# Altium PCB Pannelisation_01.PcbDoc
Units mil, origin at the board's own origin, x right, y up, seen from the top; angles counter-clockwise.
Board outline 5225 x 4925 mil, 2 copper layers (Top Layer, Bottom Layer); 213 components, 0 nets, 645 pads, 201 vias.
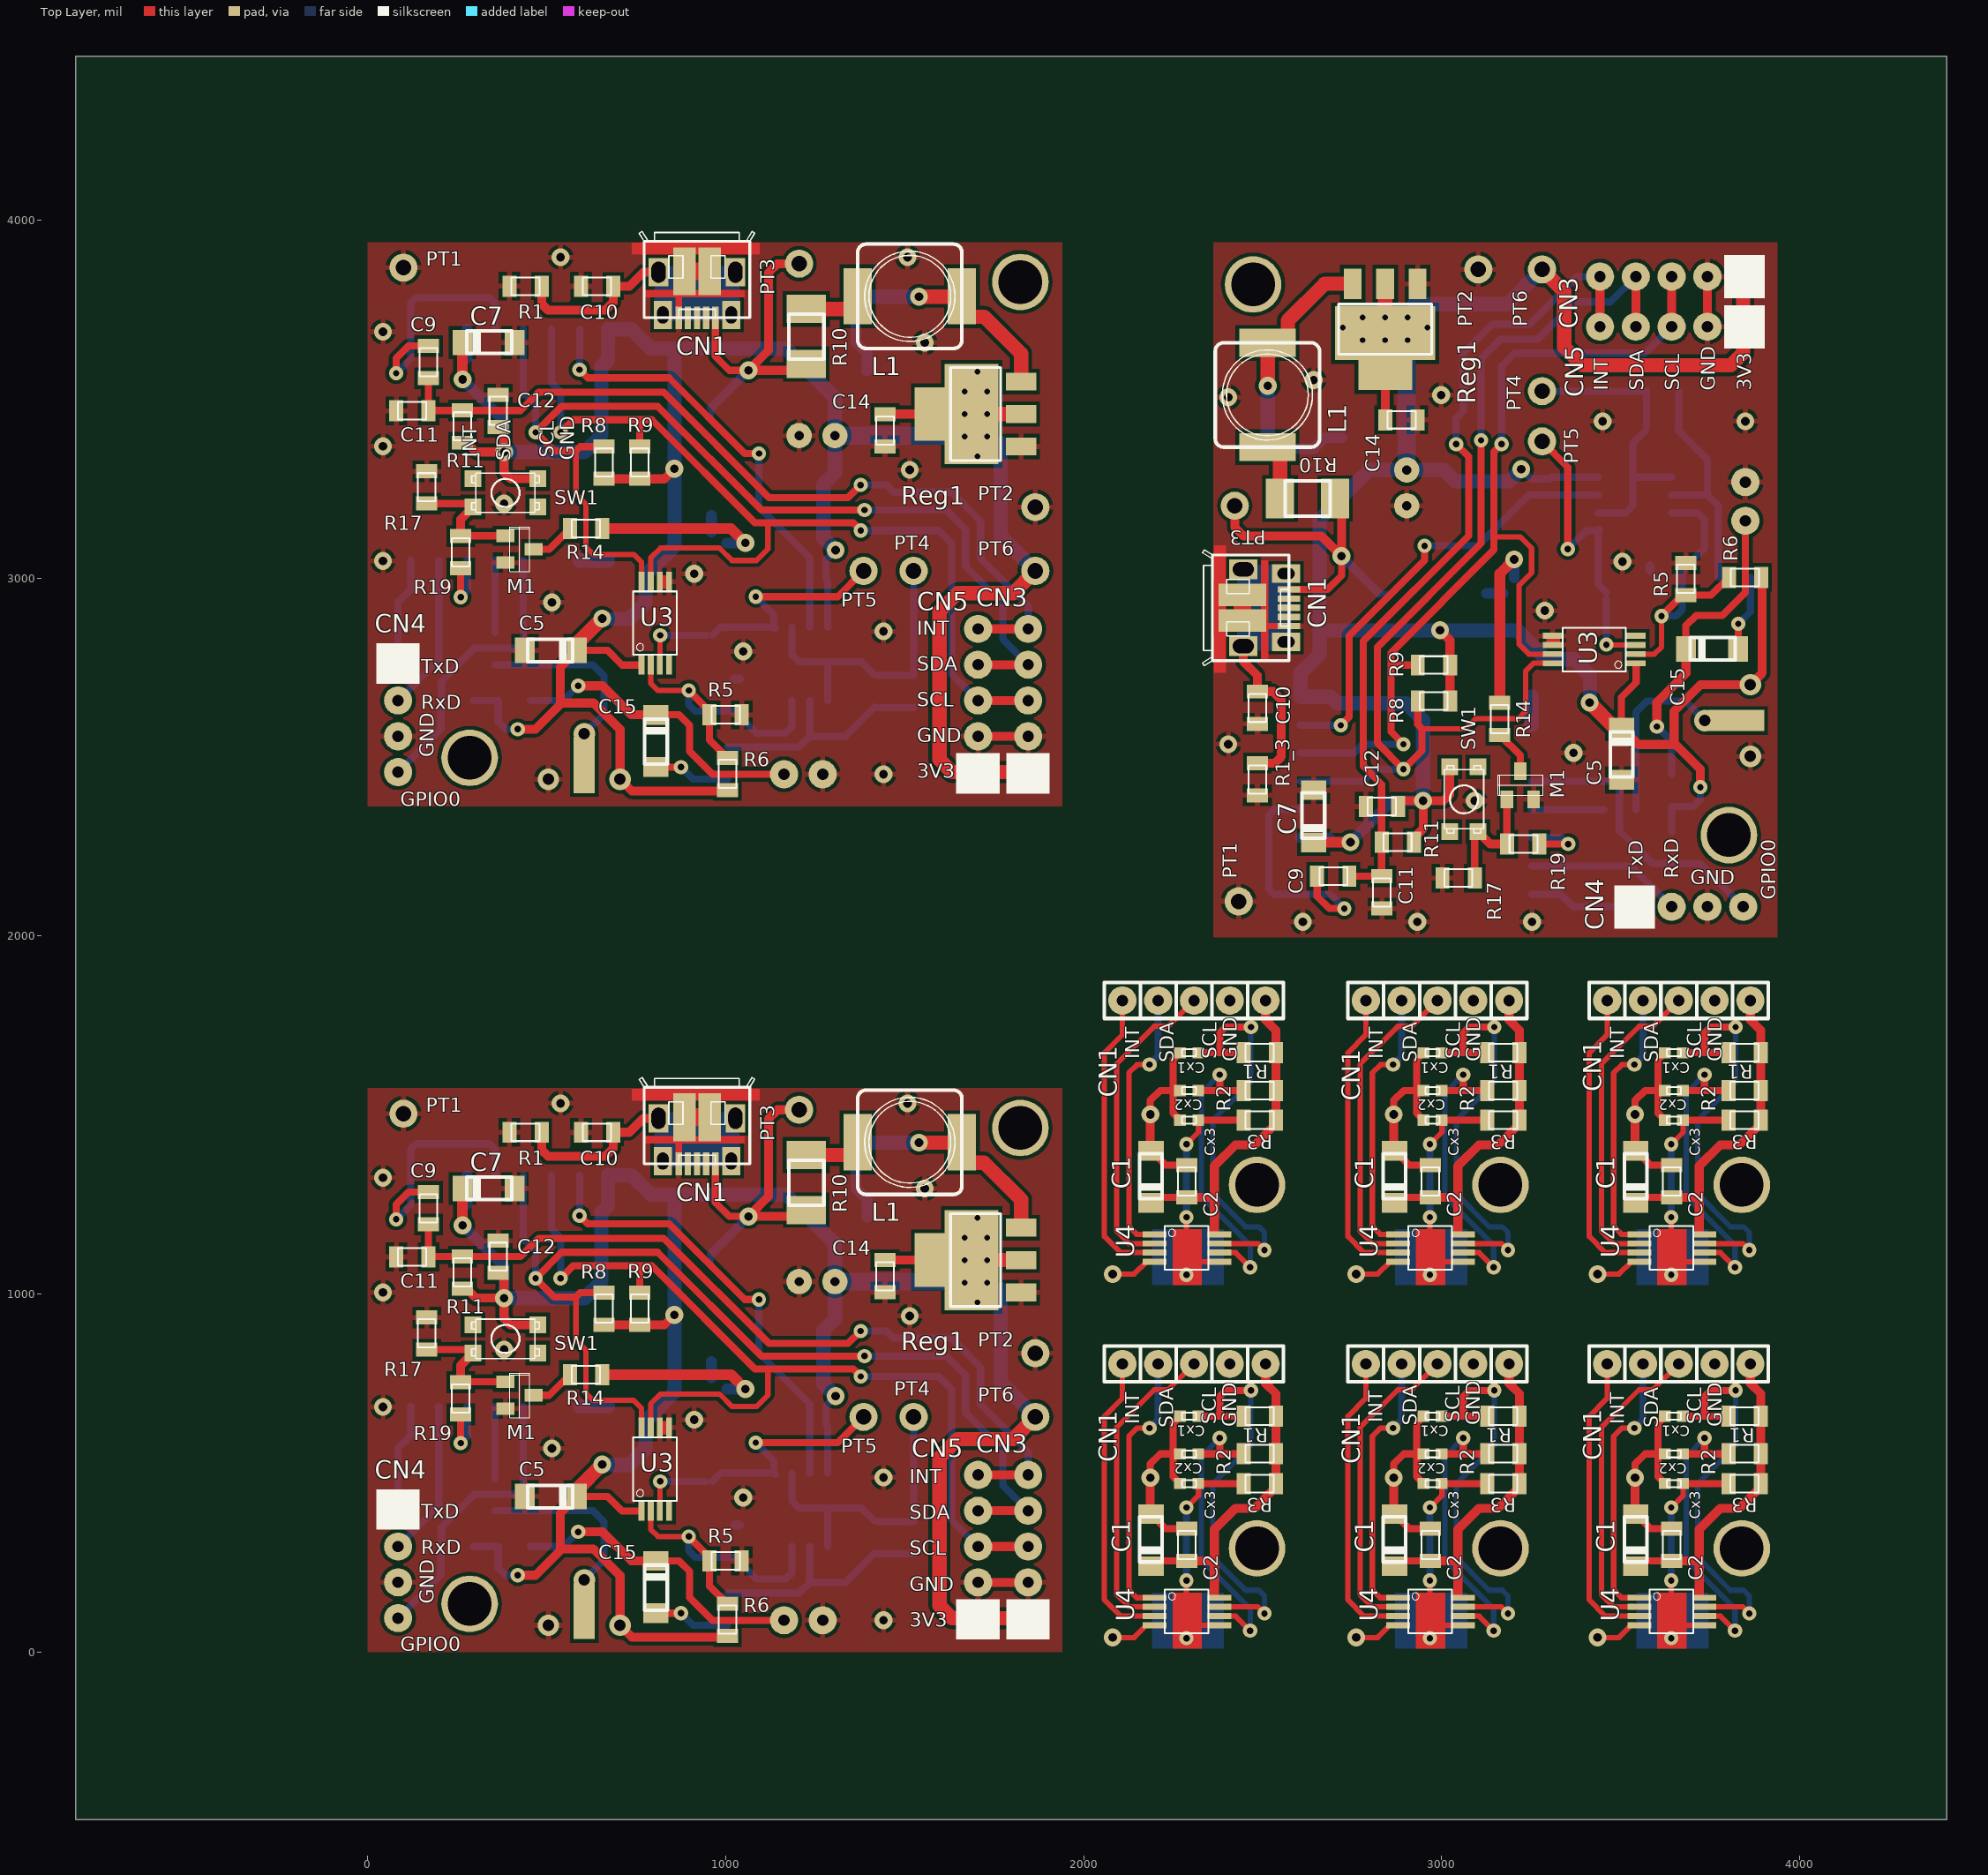
[diagram p0: Top Layer view]
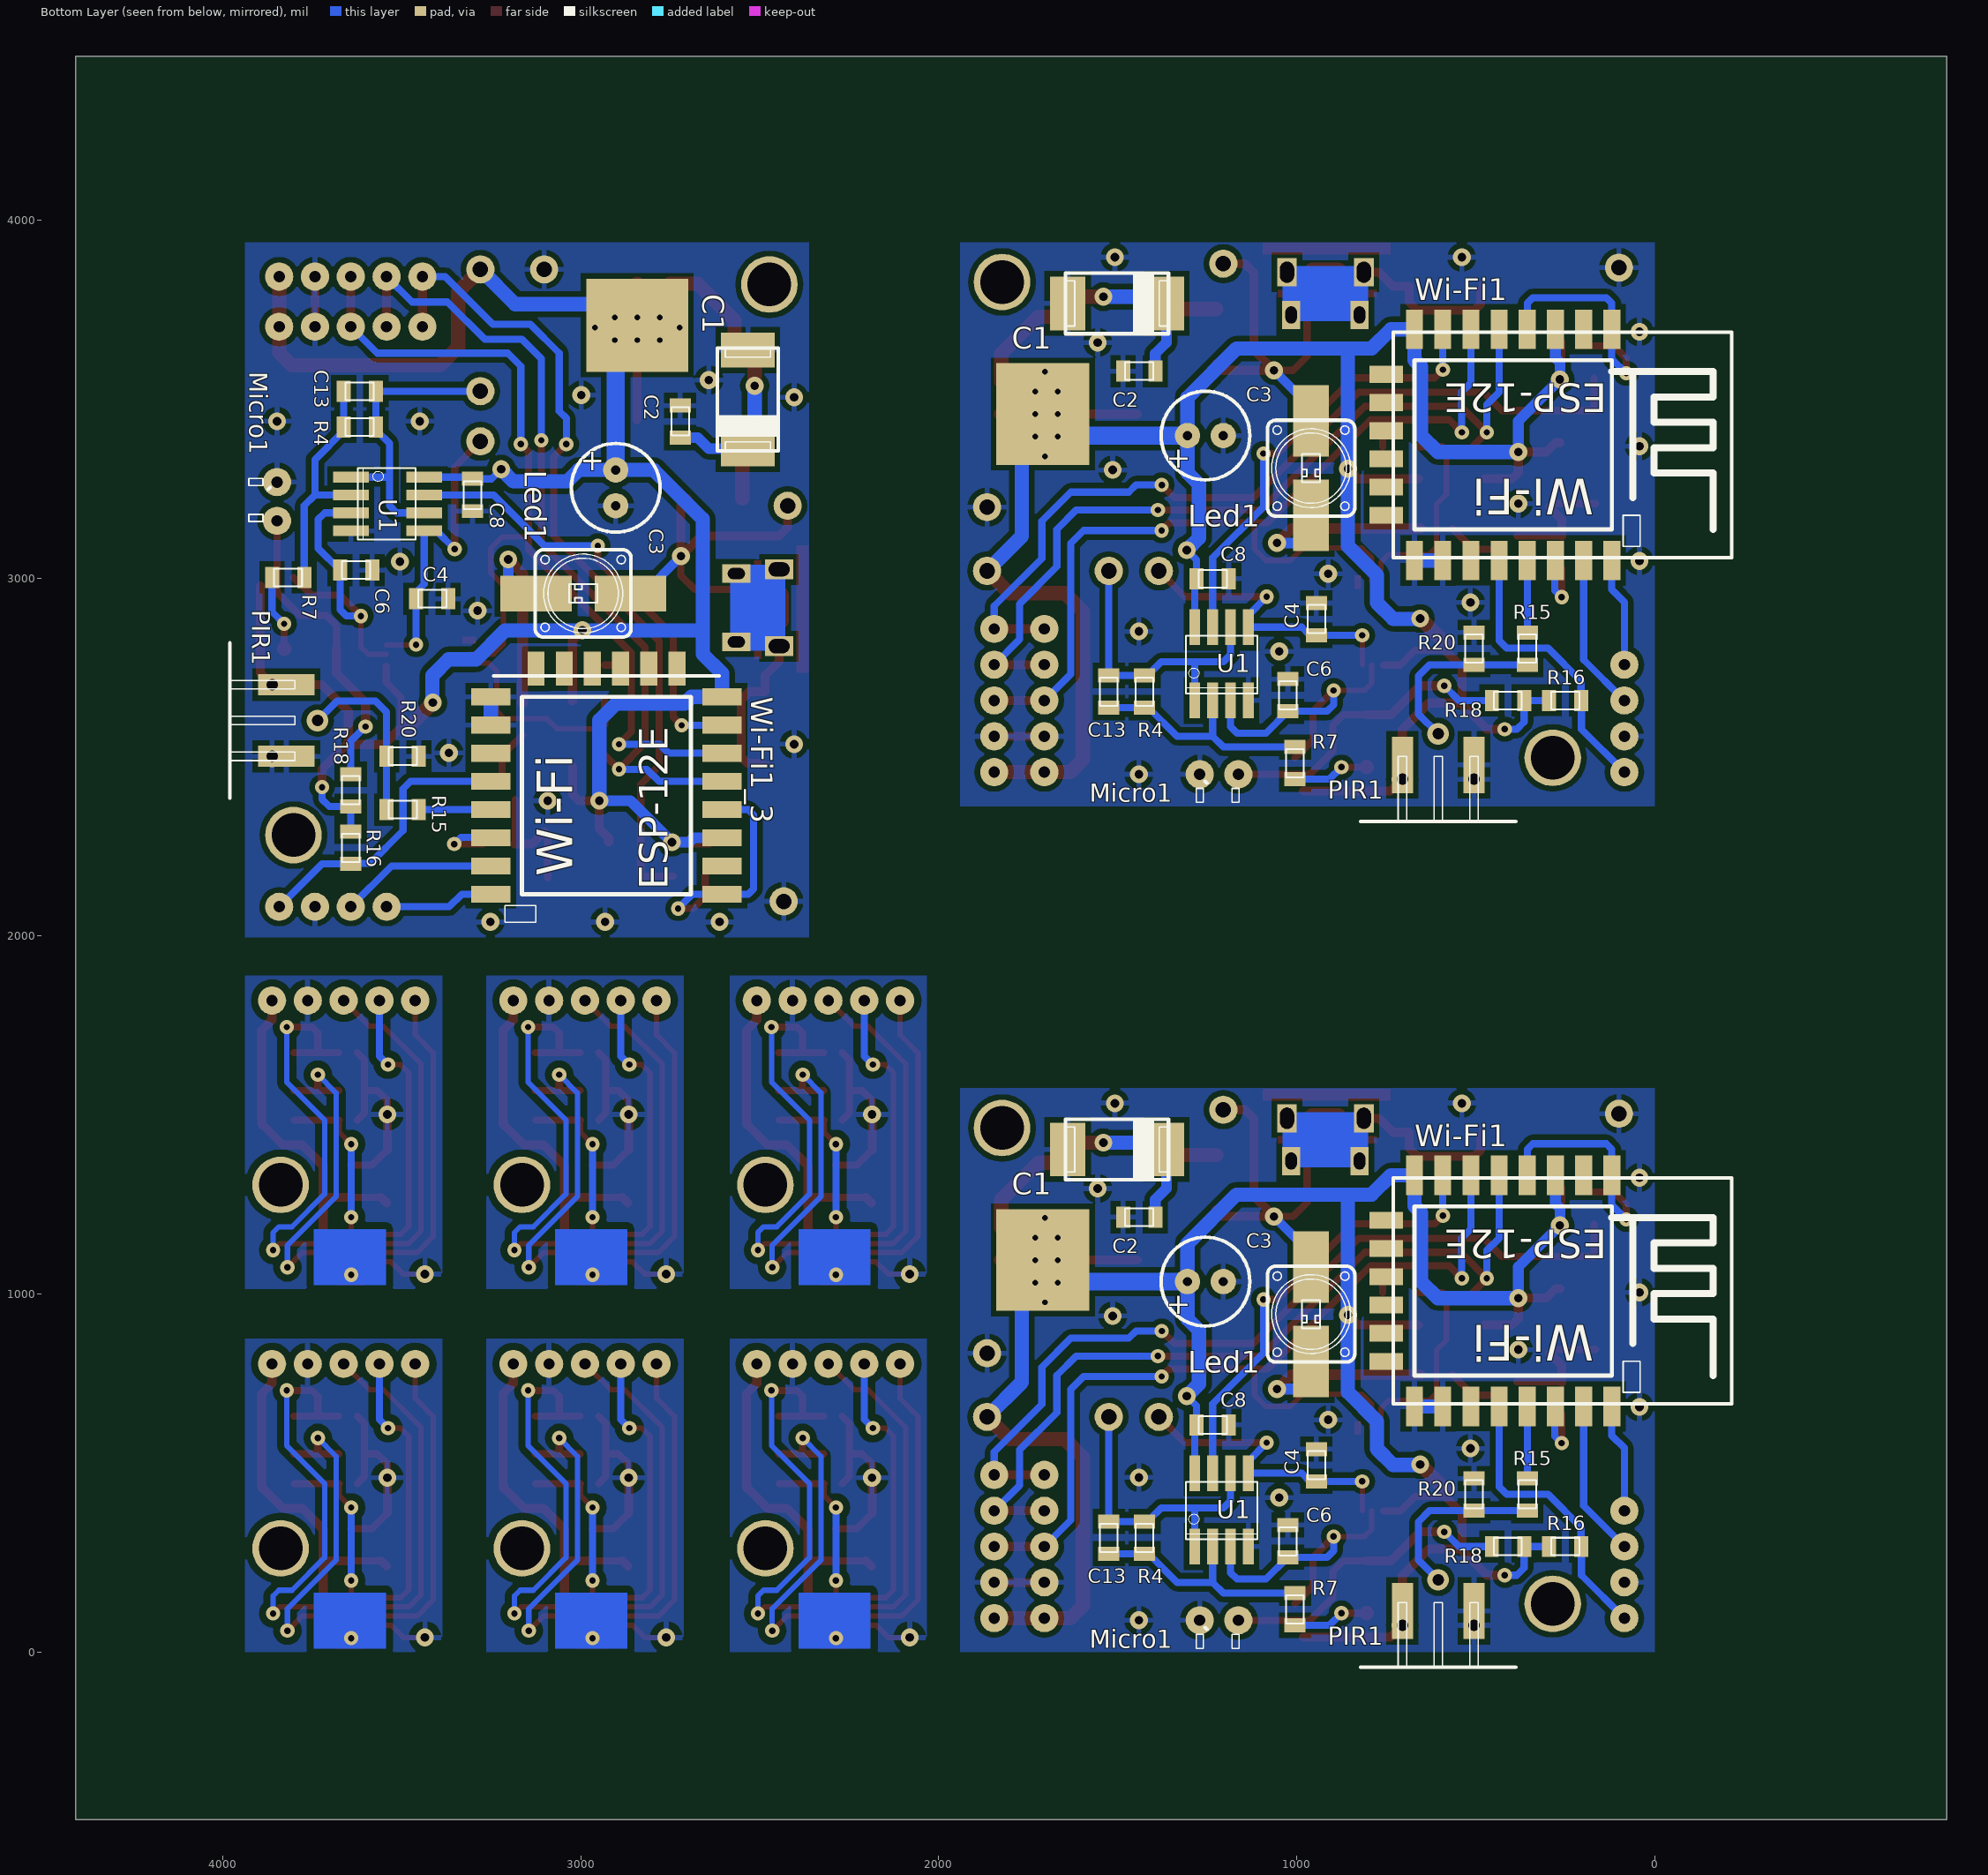
[diagram p1: Bottom Layer view, seen from below]

## Layer stack, top to bottom
Top Layer: signal copper 1.4
Dielectric: dielectric 12.6, FR-4, Dk 4.8
Bottom Layer: signal copper 1.4

## Board outline
-815,-468 4410,-468 4410,4457 -815,4457

## Design rules (kind name [scope] priority, off if disabled: settings)
Clearance [All] p1 off: gap=10
PolygonConnect [All] p1: connectstyle=Relief reliefconductorwidth=10 reliefentries=4 polygonreliefangle="90 Angle"
RoomDefinition Version_2018_01 [InComponentClass('Version_2018_01')] p1: confinementstyle=ConfineIn formatcopy=TRUE lockcomponents=FALSE outline -70,-450 4045,-450 4045,4002 -70,4002
RoutingVias [All] p1: holewidth=28 width=50 viastyle="Through Hole" minholewidth=28 minwidth=50 maxholewidth=28 maxwidth=50
ShortCircuit [All] p1 off: allowed=FALSE
SilkscreenOverComponentPads [All] p1: minsilkscreentomaskgap=10
SolderMaskExpansion [All] p1: expansion=4
UnRoutedNet [All] p1 off:
Width [All] p1: maxlimit=120 minlimit=10 preferedwidth=10
25 further rules are at their usual default settings.

## Components (designator, comment, footprint, x,y, rotation, side; value= is the part's Value field where it differs from the comment)
C1 "1µF/16V" 3216-18 3542,1255 r90 top
C1 "1µF/16V" 3216-18 2868,1255 r90 top
C1 "1µF/16V" 3216-18 2188,1255 r90 top
C1 "1µF/16V" 3216-18 2188,240 r90 top
C1 "1µF/16V" 3216-18 2868,240 r90 top
C1 "1µF/16V" 3216-18 3542,240 r90 top
C1 "220µF/16V" 7343-31 2533,3617 r270 bottom
C1 "220µF/16V" 7343-31 1620,1404 r180 bottom
C1 "220µF/16V" 7343-31 1620,3767 r180 bottom
C2 "47n" 0805 3642,1270 r90 top
C2 "47n" 0805 2968,1270 r90 top
C2 "47n" 0805 2288,1270 r90 top
C2 "47n" 0805 2288,255 r90 top
C2 "47n" 0805 2968,255 r90 top
C2 "47n" 0805 3642,255 r90 top
C2 "100n" 0805 2722,3482 r270 bottom
C2 "100n" 0805 1485,1215 r180 bottom
C2 "100n" 0805 1485,3578 r180 bottom
C3 "47µF/16V" 47µF/16V 2902,3202 r90 bottom
C3 "47µF/16V" 47µF/16V 1205,1035 r0 bottom
C3 "47µF/16V" 47µF/16V 1205,3398 r0 bottom
C4 "100n" 0805 3370,2942 r0 bottom
C4 "100n" 0805 945,567 r270 bottom
C4 "100n" 0805 945,2930 r270 bottom
C5 "10µF/6V3 tantale" "Tantale 10µF/6V3" 3502,2582 r270 top
C5 "10µF/6V3 tantale" "Tantale 10µF/6V3" 585,435 r180 top
C5 "10µF/6V3 tantale" "Tantale 10µF/6V3" 585,2798 r180 top
C6 "100n" 0805 3672,3022 r180 bottom
C6 "100n" 0805 1025,265 r90 bottom
C6 "100n" 0805 1025,2628 r90 bottom
C7 "10µF/6V3 tantale" "Tantale 10µF/6V3" 2642,2262 r90 top
C7 "10µF/6V3 tantale" "Tantale 10µF/6V3" 265,1295 r0 top
C7 "10µF/6V3 tantale" "Tantale 10µF/6V3" 265,3658 r0 top
C8 "100n" 0805 3302,3187 r90 bottom
C8 "100n" 0805 1190,635 r0 bottom
C8 "100n" 0805 1190,2998 r0 bottom
C9 "100n" 0805 2742,2167 r180 top
C9 "100n" 0805 170,1195 r90 top
C9 "100n" 0805 170,3558 r90 top
C10 "100 n" 0805 2485,2593 r90 top
C10 "100 n" 0805 596,1452 r0 top
C10 "100 n" 0805 596,3815 r0 top
C11 "100n" 0805 2833,2077 r90 top
C11 "100n" 0805 80,1104 r0 top
C11 "100n" 0805 80,3467 r0 top
C12 "100n" 0805 2788,2362 r0 top
C12 "100n" 0805 365,1149 r270 top
C12 "100n" 0805 365,3512 r270 top
C13 "120p" 0805 3662,3522 r180 bottom
C13 "120p" 0805 1525,275 r90 bottom
C13 "120p" 0805 1525,2638 r90 bottom
C14 "220n" 0805 2932,3442 r180 top
C14 "220n" 0805 1445,1005 r90 top
C14 "220n" 0805 1445,3368 r90 top
C15 "1µF/16V" 3216-18 3682,2802 r0 top
C15 "1µF/16V" 3216-18 805,255 r270 top
C15 "1µF/16V" 3216-18 805,2618 r270 top
CN1 "inch_ligne 1x5" INCH_1x5_droit 3862,1820 r180 top
CN1 "inch_ligne 1x5" INCH_1x5_droit 3188,1820 r180 top
CN1 "inch_ligne 1x5" INCH_1x5_droit 2508,1820 r180 top
CN1 "inch_ligne 1x5" INCH_1x5_droit 2508,805 r180 top
CN1 "inch_ligne 1x5" INCH_1x5_droit 3188,805 r180 top
CN1 "inch_ligne 1x5" INCH_1x5_droit 3862,805 r180 top
CN1 "USB Micro B" "USB Micro 714-2347" 2573,2917 r270 top
CN1 "USB Micro B" "USB Micro 714-2347" 920,1364 r180 top
CN1 "USB Micro B" "USB Micro 714-2347" 920,3727 r180 top
CN3 "inch_ligne 1x5" INCH_1x5_ver2_droit 3842,3842 r180 top
CN3 "inch_ligne 1x5" INCH_1x5_ver2_droit 1845,95 r90 top
CN3 "inch_ligne 1x5" INCH_1x5_ver2_droit 1845,2458 r90 top
CN4 "inch_ligne 1x4" INCH_1x4_ver2_droit 3542,2082 r0 top
CN4 "inch_ligne 1x4" INCH_1x4_ver2_droit 85,395 r270 top
CN4 "inch_ligne 1x4" INCH_1x4_ver2_droit 85,2758 r270 top
CN5 "inch_ligne 1x5" INCH_1x5_ver2_droit 3842,3702 r180 top
CN5 "inch_ligne 1x5" INCH_1x5_ver2_droit 1705,95 r90 top
CN5 "inch_ligne 1x5" INCH_1x5_ver2_droit 1705,2458 r90 top
Cx1 "PONT" 0402 3674,1674 r180 top
Cx1 "PONT" 0402 3000,1674 r180 top
Cx1 "PONT" 0402 2320,1674 r180 top
Cx1 "PONT" 0402 2320,659 r180 top
Cx1 "PONT" 0402 3000,659 r180 top
Cx1 "PONT" 0402 3674,659 r180 top
Cx2 "PONT" 0402 3674,1568.73 r180 top
Cx2 "PONT" 0402 3000,1568.73 r180 top
Cx2 "PONT" 0402 2320,1568.73 r180 top
Cx2 "PONT" 0402 2320,553.73 r180 top
Cx2 "PONT" 0402 3000,553.73 r180 top
Cx2 "PONT" 0402 3674,553.73 r180 top
Cx3 "PONT" 0402 3674,1486 r180 top
Cx3 "PONT" 0402 3000,1486 r180 top
Cx3 "PONT" 0402 2320,1486 r180 top
Cx3 "PONT" 0402 2320,471 r180 top
Cx3 "PONT" 0402 3000,471 r180 top
Cx3 "PONT" 0402 3674,471 r180 top
L1 "100µH CD74R series" "SELF CD74R" 2513,3657 r90 top
L1 "100µH CD74R series" "SELF CD74R" 1660,1424 r0 top
L1 "100µH CD74R series" "SELF CD74R" 1660,3787 r0 top
Led1 "LTW5AM" LTW5AM 2993,2957 r0 bottom
Led1 "LTW5AM" LTW5AM 960,944 r270 bottom
Led1 "LTW5AM" LTW5AM 960,3307 r270 bottom
M1 "NTR4501N" "SOT23 (NTR4501)" 3182,2382 r0 top
M1 "NTR4501N" "SOT23 (NTR4501)" 385,755 r270 top
M1 "NTR4501N" "SOT23 (NTR4501)" 385,3118 r270 top
Micro1 "Electret" "Micro_electret simple" 3848,3168 r270 bottom
Micro1 "Electret" "Micro_electret simple" 1171,89 r180 bottom
Micro1 "Electret" "Micro_electret simple" 1171,2452 r180 bottom
PIR1 "PIR_WL" PIR_WL 705,115 r180 bottom
PIR1 "PIR_WL" PIR_WL 3822,2702 r270 bottom
PIR1 "PIR_WL" PIR_WL 705,2478 r180 bottom
PT1 "GND" "PTEST boucle"#1 2433,2097 r90 top
PT1 "GND" "PTEST boucle"#1 100,1504 r0 top
PT1 "GND" "PTEST boucle"#1 100,3867 r0 top
PT2 "GND" "PTEST boucle"#1 3102,3862 r90 top
PT2 "GND" "PTEST boucle"#1 1865,835 r0 top
PT2 "GND" "PTEST boucle"#1 1865,3198 r0 top
PT3 "+5V" "PTEST boucle"#1 2422,3202 r90 top
PT3 "+5V" "PTEST boucle"#1 1205,1515 r0 top
PT3 "+5V" "PTEST boucle"#1 1205,3878 r0 top
PT4 "Son" "PTEST boucle"#2 3282,3522 r90 top
PT4 "Son" "PTEST boucle"#2 1525,655 r0 top
PT4 "Son" "PTEST boucle"#2 1525,3018 r0 top
PT5 "Seuil" "PTEST boucle"#2 3282,3382 r90 top
PT5 "Seuil" "PTEST boucle"#2 1385,655 r0 top
PT5 "Seuil" "PTEST boucle"#2 1385,3018 r0 top
PT6 "+3V3" "PTEST boucle"#3 3262,3862 r90 top
PT6 "+3V3" "PTEST boucle"#3 1865,675 r0 top
PT6 "+3V3" "PTEST boucle"#3 1865,3038 r0 top
R1 "10K" 0805 3801,1674 r0 top
R1 "10K" 0805 3127,1674 r0 top
R1 "10K" 0805 2447,1674 r0 top
R1 "10K" 0805 2447,659 r0 top
R1 "10K" 0805 3127,659 r0 top
R1 "10K" 0805 3801,659 r0 top
R1 "100K" 0805 396,1452 r0 top
R1 "100K" 0805 396,3815 r0 top
R1_3 "100K" 0805 2485,2393 r90 top (schematic designator R1)
R2 "10K" 0805 3801,1569 r0 top
R2 "10K" 0805 3127,1569 r0 top
R2 "10K" 0805 2447,1569 r0 top
R2 "10K" 0805 2447,554 r0 top
R2 "10K" 0805 3127,554 r0 top
R2 "10K" 0805 3801,554 r0 top
R3 "10K" 0805 3801,1486 r0 top
R3 "10K" 0805 3127,1486 r0 top
R3 "10K" 0805 2447,1486 r0 top
R3 "10K" 0805 2447,471 r0 top
R3 "10K" 0805 3127,471 r0 top
R3 "10K" 0805 3801,471 r0 top
R4 "100K" 0805 3662,3422 r180 bottom
R4 "100K" 0805 1425,275 r90 bottom
R4 "100K" 0805 1425,2638 r90 bottom
R5 "10K" 0805 3682,3042 r270 top
R5 "10K" 0805 1045,255 r180 top
R5 "10K" 0805 1045,2618 r180 top
R6 "10K" 0805 3802,3002 r0 top
R6 "10K" 0805 1005,135 r270 top
R6 "10K" 0805 1005,2498 r270 top
R7 "1K" 0805 3862,3002 r180 bottom
R7 "1K" 0805 1005,75 r90 bottom
R7 "1K" 0805 1005,2438 r90 bottom
R8 "10K" 0805 2933,2657 r0 top
R8 "10K" 0805 660,1004 r270 top
R8 "10K" 0805 660,3367 r270 top
R9 "10K" 0805 2933,2757 r0 top
R9 "10K" 0805 760,1004 r270 top
R9 "10K" 0805 760,3367 r270 top
R10 "0R33" 1210 2702,3222 r180 top
R10 "0R33" 1210 1225,1235 r90 top
R10 "0R33" 1210 1225,3598 r90 top
R11 "4K7" 0805 2832,2262 r0 top
R11 "4K7" 0805 265,1105 r270 top
R11 "4K7" 0805 265,3468 r270 top
R14 "68" 0805 3162,2562 r90 top
R14 "68" 0805 565,775 r0 top
R14 "68" 0805 565,3138 r0 top
R15 "330" 0805 3452,2353 r0 bottom
R15 "330" 0805 356,485 r270 bottom
R15 "330" 0805 356,2848 r270 bottom
R16 "10K" 0805 3642,2202 r90 bottom
R16 "10K" 0805 205,295 r0 bottom
R16 "10K" 0805 205,2658 r0 bottom
R17 "15K" 0805 3002,2162 r0 top
R17 "15K" 0805 165,935 r270 top
R17 "15K" 0805 165,3298 r270 top
R18 "2K" 0805 3642,2452 r270 bottom
R18 "2K" 0805 455,295 r180 bottom
R18 "2K" 0805 455,2658 r180 bottom
R19 "470" 0805 3273,2257 r180 top
R19 "470" 0805 260,664 r90 top
R19 "470" 0805 260,3027 r90 top
R20 "15K" 0805 3452,2502 r0 bottom
R20 "15K" 0805 505,485 r270 bottom
R20 "15K" 0805 505,2848 r270 bottom
Reg1 "LM1117/33" "SOT-223 thermo1" 2842,3822 r180 top
Reg1 "LM1117/33" "SOT-223 thermo1" 1825,1095 r90 top
Reg1 "LM1117/33" "SOT-223 thermo1" 1825,3458 r90 top
SW1 "KMR 4" "µSwitch KMR4" 3062,2382 r90 top
SW1 "KMR 4" "µSwitch KMR4" 385,875 r0 top
SW1 "KMR 4" "µSwitch KMR4" 385,3238 r0 top
U1 "AD8052" SOIC08 3642,3282 r180 bottom
U1 "AD8052" SOIC08 1285,295 r90 bottom
U1 "AD8052" SOIC08 1285,2658 r90 bottom
U3 "MCP47FEB21" TSSOP_8 3542,2762 r180 top
U3 "MCP47FEB21" TSSOP_8 765,395 r90 top
U3 "MCP47FEB21" TSSOP_8 765,2758 r90 top
U4 "MCP9808" MSOP-08 3552,1167 r0 top
U4 "MCP9808" MSOP-08 2878,1167 r0 top
U4 "MCP9808" MSOP-08 2198,1167 r0 top
U4 "MCP9808" MSOP-08 2198,152 r0 top
U4 "MCP9808" MSOP-08 2878,152 r0 top
U4 "MCP9808" MSOP-08 3552,152 r0 top
Wi-Fi1 "ESP-12E" ESP-12E 120,1324 r270 bottom
Wi-Fi1 "ESP-12E" ESP-12E 120,3687 r270 bottom
Wi-Fi1_3 "ESP-12E" ESP-12E 2613,2117 r0 bottom (schematic designator Wi-Fi1)

## Footprints (in the part's own frame and the unit in brackets; to place one, negate y for a bottom-side part, rotate by r counter-clockwise, add the part's x,y. Pads: shape width x height; smd on the part's side, far side on the other; paste and mask are expansions set on the pad)
47µF/16V [mm]
  round 1.8 hole 0.65: 1(2.54,0) 2(0,0)
  silkscreen extent -1.88,-3.15 4.42,3.15
0402 [mm]
  rect 0.838x0.8 smd: 1(0,0) 2(1.3,0)
  silkscreen extent 0.15,-0.25 1.15,0.25
0805 [mm] "résistance CMS"
  rect 1x1.5 smd: 1(0,0) 2(2.286,0)
  silkscreen extent 0.13,-0.63 2.13,0.63
1210 [mm] "résistance CMS 0,5W ERJ14B"
  rect 2x2.8 smd: 1(0,0) 2(3.9,0)
  silkscreen extent 0.33,-1.26 3.53,1.24
3216-18 [mm] "condensateur tantale CMS (3,2 x 1,6 x 1,6)"
  rect 1.4x1.8 smd: 1(0,0) 2(3.7,0)
  silkscreen extent 0.3,-0.79 3.5,0.81
7343-31 [mm] "condensateur tantale CMS (7,3 x 4,3 x 3,0)"
  rect 2.5x3.8 smd: 1(6.5,0) 2(-0.5,0)
  silkscreen extent -0.65,-2.15 6.65,2.15
ESP-12E [mm] "module Wi-Fi"
  rect 2.8x1.2 smd: 1(-0.2,0) 2(-0.2,-2) 3(-0.2,-4) 4(-0.2,-6) 5(-0.2,-8) 6(-0.2,-10) 7(-0.2,-12) 8(-0.2,-14) 15(16.2,-14) 16(16.2,-12) 17(16.2,-10) 18(16.2,-8) 19(16.2,-6) 20(16.2,-4) 21(16.2,-2) 22(16.2,0)
  rect 1.2x2.4 smd: 9(3,-16) 10(5,-16) 11(7,-16) 12(9,-16) 13(11,-16) 14(13,-16)
  silkscreen extent 0,-15.5 16,8.5
INCH_1x4_ver2_droit [mm] "simple rangée 2,54 mm"
  round 2 hole 0.8: 1(0,0) 2(2.54,0) 3(5.08,0) 4(7.62,0)
  silkscreen extent -1.52,-1.55 1.35,1.52
INCH_1x5_droit [mm] "simple rangée 2,54 mm"
  round 2 hole 0.8: 1(0,0) 2(2.54,0) 3(5.08,0) 4(7.62,0) 5(10.16,0)
  silkscreen extent -1.27,-1.27 11.43,1.27
INCH_1x5_ver2_droit [mm] "simple rangée 2,54 mm"
  round 2 hole 0.8: 1(0,0) 2(2.54,0) 3(5.08,0) 4(7.62,0) 5(10.16,0)
  silkscreen extent -1.52,-1.52 1.35,1.55
LTW5AM [mil] "LED golden dragon"
  rect 200x100 smd: 1(-132,0) 2(132,0)
  silkscreen extent -134,-122 134,122
"Micro_electret simple" [mm] "Microphone coudé sur PCB sans sérigraphie"
  round 2 hole 0.8: 0(-2.54,0) 1(0.203,0)
  silkscreen extent -2.79,-2 0.25,-0.51
MSOP-08 [mil] "boîtier DGK"
  rect 66x17 smd: 1(0,0) 2(0,-25.59) 3(0,-51.18) 4(0,-76.77) 5(181.1,-76.77) 6(181.1,-51.18) 7(181.1,-25.59) 8(181.1,0)
  silkscreen extent 29,-99 151,23
PIR_WL [mm] "détecteur infrarouge"
  rect 1.5x4 smd: 1(0,0) 3(5.08,0)
  rect 1.5x4 smd far side: 2(2.54,0)
  silkscreen extent -2.96,-4 8.04,0.6
"PTEST boucle"#1 [mm] "RS 262-2179"
  round 2 hole 1.1: 1(0,0)
"PTEST boucle"#2 [mm] "RS 262-2179"
  round 2 hole 1.1: 1(0,0.051)
"PTEST boucle"#3 [mm] "RS 262-2179"
  round 2 hole 1.1: 1(0,-0.457)
"SELF CD74R" [mm] "Self 7,4 x 7,4"
  rect 2x4 smd: 1(0,0) 2(-7.4,0)
  silkscreen extent -7.4,-3.7 0,3.7
SOIC08 [mil]
  rect 100x30 smd: 1(0,0) 2(0,-50) 3(0,-100) 4(0,-150) 5(205,-150) 6(205,-100) 7(205,-50) 8(205,0)
  silkscreen extent 20,-175 181,25
"SOT23 (NTR4501)" [mil] "D->1 G->2 S->3"
  rect 35x50 smd: 1(37.4,78.74) 2(0,0) 3(74.8,0)
  silkscreen extent -25,12 100,68
"SOT-223 thermo1" [mil] "empreinte pour SOT-223"
  rect 50x84.65 smd: 1(-90.55,0) 2(0,0) 3(90.55,0)
  rect 150x90 smd: 2(0,251.97)
  rect 280x150 smd: 2(0,138)
  rect 284x260 smd far side: 2(0,116)
  silkscreen extent -130,57 130,197
"Tantale 10µF/6V3" [mm] "1206 ou 3216-18 (175-4041)"
  rect 1.4x1.8 smd: 1(0,0) 2(3.7,0)
  silkscreen extent 0.3,-0.79 3.5,0.81
TSSOP_8 [mm]
  rect 1.4x0.42 smd: 1(0,0) 2(0,-0.65) 3(0,-1.3) 4(0,-1.95) 5(5.9,-1.95) 6(5.9,-1.3) 7(5.9,-0.65) 8(5.9,0)
  silkscreen extent 0.7,-2.51 5.2,0.58
"USB Micro 714-2347" [mm] "empreinte pour micro USB RS 714-2347"
  rect 0.45x1.6 smd: 1(-1.3,0) 2(-0.65,0) 3(0,0) 4(0.65,0) 5(1.3,0)
  rect 1.3x2 hole 0.8 slot 1.2 at 90 deg: 6(-2.425,-0.2) 7(2.425,-0.2)
  rect 1.4x2 hole 1 slot 1.5 at 90 deg: 8(-2.725,-3.23) 9(2.725,-3.23)
  rect 1.6x3.4 smd: 10(-0.9,-3.3) 11(0.9,-3.3)
  silkscreen extent -4.1,-6.12 4.1,0
"µSwitch KMR4" [mm] "µSwitch KMR 4"
  rect 1.2x1.2 smd: 1(-2.3,1) 2(2.3,1) 3(-2.3,-1) 4(2.3,-1)
  silkscreen extent -2.4,-1.4 2.4,1.4

## Part data
C1 C1 C1 C1 C1 C1 C15 C15 C15: library part "tantale 1µF/16V", "145-7406 case 3216-18"
C1 C1 C1: library part "tantale 220µF/16V", "253-5290 case 7343-31"
C2 C2 C2 C2 C2 C2 C2 C2 C2 C4 C4 C4 C6 C6 C6 C8 C8 C8 C9 C9 C9 C10 C10 C10 C11 C11 C11 C12 C12 C12 C13 C13 C13 C14 C14 C14: library part Cap_CMS_0805, "CMS 0805"
C3 C3 C3: "électrochimique diam. 6,3mm 128-1810"
C5 C5 C5 C7 C7 C7: library part "tantale 10µF/6V3", "175-4041 ou 145-7412 case 3216-18"
CN1 CN1 CN1 CN1 CN1 CN1 CN3 CN3 CN3 CN5 CN5 CN5: library part Inch_1x5_droit, "Inch_1x5_droit"
CN1 CN1 CN1: "Amphenol 714-2347"
CN4 CN4 CN4: library part Inch_1x4_droit, "Inch_1x4_droit"
Cx1 Cx1 Cx1 Cx1 Cx1 Cx1 Cx2 Cx2 Cx2 Cx2 Cx2 Cx2 Cx3 Cx3 Cx3 Cx3 Cx3 Cx3: library part Pont, "Pont pour configuration I2C"
L1 L1 L1: library part "Self CD74R", "SMT CD74R Aliexpress"
Led1 Led1 Led1: library part "LTW5AM LED", "LED Golden Dragon Plus"
M1 M1 M1: "MOSFET canal N"
Micro1 Micro1 Micro1: library part Microphone_03, "Microphone électret"
PIR1 PIR1 PIR1: library part PIR_01, "Détecteur infrarouge"
PT1 PT1 PT1 PT2 PT2 PT2 PT3 PT3 PT3 PT4 PT4 PT4 PT5 PT5 PT5 PT6 PT6 PT6: library part "PTEST boucle", "pointe de test CI 262-2179"
R1 R1 R1 R1 R1 R1 R1 R1 R1_3 R2 R2 R2 R2 R2 R2 R3 R3 R3 R3 R3 R3 R4 R4 R4 R5 R5 R5 R6 R6 R6 R7 R7 R7 R8 R8 R8 R9 R9 R9 R11 R11 R11 R14 R14 R14 R15 R15 R15 R16 R16 R16 R17 R17 R17 R18 R18 R18 R19 R19 R19 R20 R20 R20: library part "Res CMS 0805", "CMS 0805"
R10 R10 R10: library part "Res CMS 1210 ERJ14B", "CMS 1210"
Reg1 Reg1 Reg1: library part LM1117MPX-3.3, "Régulateur SOT-223"
SW1 SW1 SW1: library part µSwitch, "KMR 4 Series 793-1605"
U1 U1 U1: "AOP"
U3 U3 U3: "DAC I2C (RS : 879-3261)"
U4 U4 U4 U4 U4 U4: "Digital temperature Sensor"
Wi-Fi1 Wi-Fi1 Wi-Fi1_3: "ESP-12E module Wi-Fi"

## Free pads (board coordinates)
  round 158 hole 122: 1(285,135) 1(285,2498) 1(3802,2282) 2(1823,1464) 2(1823,3827) 2(2473,3820) 3(2484,290) 3(2484,1305) 3(3164,290) 3(3164,1305) 3(3838,290) 3(3838,1305)

## Via types
v1: diameter 40, hole 18, Top Layer to Bottom Layer, 93 vias
v2: diameter 50, hole 24, Top Layer to Bottom Layer, 75 vias
v3: diameter 39.37, hole 15.75, Top Layer to Bottom Layer, 24 vias
v4: diameter 60, hole 32, Top Layer to Bottom Layer, 9 vias

## Nets (pads, with @x,y where several pads share a name; then routed paths per layer and width w, separated by ;. In a path a pad name is that pad's centre, name@x,y a point inside that pad or via, vN(x,y) a via of type N, cw(c..) or ccw(c..) an arc to the next point about the centre after c; other vN are vias at no path point)
pads on no net: C1.1 C1.2 C2.1 C2.2 C3.1 C3.2 C4.1 C4.2 C5.1 C5.2 C6.1 C6.2 C7.1 C7.2 C8.1 C8.2 C9.1 C9.2 C10.1 C10.2 C11.1 C11.2 C12.1 C12.2 C13.1 C13.2 C14.1 C14.2 C15.1 C15.2 CN1.1 CN1.2 CN1.3 CN1.4 CN1.5 CN1.6 CN1.7 CN1.8 CN1.9 CN1.10 CN1.11 CN3.1 CN3.2 CN3.3 CN3.4 CN3.5 CN4.1 CN4.2 CN4.3 CN4.4 CN5.1 CN5.2 CN5.3 CN5.4 CN5.5 Cx1.1 Cx1.2 Cx2.1 Cx2.2 Cx3.1 Cx3.2 L1.1 L1.2 Led1.1 Led1.2 M1.1 M1.2 M1.3 Micro1.0 Micro1.1 PIR1.1 PIR1.2 PIR1.3 PT1.1 PT2.1 PT3.1 PT4.1 PT5.1 PT6.1 R1.1 R1.2 R1_3.1 R1_3.2 R2.1 R2.2 R3.1 R3.2 R4.1 R4.2 R5.1 R5.2 R6.1 R6.2 R7.1 R7.2 R8.1 R8.2 R9.1 R9.2 R10.1 R10.2 R11.1 R11.2 R14.1 R14.2 R15.1 R15.2 R16.1 R16.2 R17.1 R17.2 R18.1 R18.2 R19.1 R19.2 R20.1 R20.2 Reg1.1 Reg1.2 Reg1.3 SW1.1 SW1.2 SW1.3 SW1.4 U1.1 U1.2 U1.3 U1.4 U1.5 U1.6 U1.7 U1.8 U3.1 U3.2 U3.3 U3.4 U3.5 U3.6 U3.7 U3.8 U4.1 U4.2 U4.3 U4.4 U4.5 U4.6 U4.7 U4.8 Wi-Fi1.1 Wi-Fi1.2 Wi-Fi1.3 Wi-Fi1.4 Wi-Fi1.5 Wi-Fi1.6 Wi-Fi1.7 Wi-Fi1.8 Wi-Fi1.9 Wi-Fi1.10 Wi-Fi1.11 Wi-Fi1.12 Wi-Fi1.13 Wi-Fi1.14 Wi-Fi1.15 Wi-Fi1.16 Wi-Fi1.17 Wi-Fi1.18 Wi-Fi1.19 Wi-Fi1.20 Wi-Fi1.21 Wi-Fi1.22 Wi-Fi1_3.1 Wi-Fi1_3.2 Wi-Fi1_3.3 Wi-Fi1_3.4 Wi-Fi1_3.5 Wi-Fi1_3.6 Wi-Fi1_3.7 Wi-Fi1_3.8 Wi-Fi1_3.9 Wi-Fi1_3.10 Wi-Fi1_3.11 Wi-Fi1_3.12 Wi-Fi1_3.13 Wi-Fi1_3.14 Wi-Fi1_3.15 Wi-Fi1_3.16 Wi-Fi1_3.17 Wi-Fi1_3.18 Wi-Fi1_3.19 Wi-Fi1_3.20 Wi-Fi1_3.21 Wi-Fi1_3.22
copper on no net: | length 126078
  Top Layer w10: 170,1104 171,1105 ; 170,3467 171,3468 ; 486,1442 486,1452 486,1462 ; 486,3805 486,3815 486,3825 ; 1333.2,1388.54 1368.66,1424 ; 1333.2,3751.54 1368.66,3787 ; 1660,1424 1662.09,1421.91 ; 1660,3787 1662.09,3784.91 ; 2475,2483 2485,2483 2495,2483 ; 2513,3365.66 2548.46,3330.2 ; 2513,3657 2515.09,3659.09 ; 2832,2168 2833,2167
  Top Layer w15: 582,992 582,871 610,843 610,723.12 630.12,703 743,703 765,681 765,627.28 ; 582,3355 582,3234 610,3206 610,3086.12 630.12,3066 743,3066 765,3044 765,2990.28 ; 790.59,395 790.59,343.41 811,323 v1(897,323) ; 790.59,627.28 790.59,693.59 818,721 983,721 1018,686 1086,686 1118,718 1118,791 ; 790.59,2758 790.59,2706.41 811,2686 v1(897,2686) ; 790.59,2990.28 790.59,3056.59 818,3084 983,3084 1018,3049 1086,3049 1118,3081 1118,3154 ; 816.18,395 v1@816.18,476.18 ; 816.18,2758 v1@816.18,2839.18 ; 955,255 955,265 ; 955,2618 955,2628 ; v2(2081,41) 2141,41 2175.23,75.23 2198,75.23 ; v2(2081,1056) 2141,1056 2175.23,1090.23 2198,1090.23 ; 2108,805 2108,709 2058,659 2058,146 2103.18,100.82 2198,100.82 ; 2108,1820 2108,1724 2058,1674 2058,1161 2103.18,1115.82 2198,1115.82 ; 2146.62,153.56 2126,174.19 2126,603 2149,626 v1(2184,626) ; 2146.62,1168.56 2126,1189.19 2126,1618 2149,1641 v1(2184,1641) ; 2148,152 2198,152 ; 2148,1167 2198,1167 ; 2198,126.41 2126.59,126.41 2092,161 2092,628 2197,733 2236,733 2308,805 ; 2198,1141.41 2126.59,1141.41 2092,1176 2092,1643 2197,1748 2236,1748 2308,1820 ; v1(2287,200) 2287,94 2305.77,75.23 2379.1,75.23 ; v1(2287,404) 2320.67,437.67 2320.67,471 ; v1(2287,1215) 2287,1109 2305.77,1090.23 2379.1,1090.23 ; v1(2287,1419) 2320.67,1452.67 2320.67,1486 ; 2379.1,100.82 2424.18,100.82 v1(2465,60) ; 2379.1,126.41 2486.59,126.41 v1(2505,108) ; 2379.1,1115.82 2424.18,1115.82 v1(2465,1075) ; 2379.1,1141.41 2486.59,1141.41 v1(2505,1123) ; v2(2761,41) 2821,41 2855.23,75.23 2878,75.23 ; v2(2761,1056) 2821,1056 2855.23,1090.23 2878,1090.23 ; 2788,805 2788,709 2738,659 2738,146 2783.18,100.82 2878,100.82 ; 2788,1820 2788,1724 2738,1674 2738,1161 2783.18,1115.82 2878,1115.82 ; 2826.62,153.56 2806,174.19 2806,603 2829,626 v1(2864,626) ; 2826.62,1168.56 2806,1189.19 2806,1618 2829,1641 v1(2864,1641) ; 2828,152 2878,152 ; 2828,1167 2878,1167 ; 2878,126.41 2806.59,126.41 2772,161 2772,628 2877,733 2916,733 2988,805 ; 2878,1141.41 2806.59,1141.41 2772,1176 2772,1643 2877,1748 2916,1748 2988,1820 ; 2945,2579 3066,2579 3094,2607 3213.88,2607 3234,2627.12 3234,2740 3256,2762 3309.72,2762 ; v1(2967,200) 2967,94 2985.77,75.23 3059.1,75.23 ; v1(2967,404) 3000.67,437.67 3000.67,471 ; v1(2967,1215) 2967,1109 2985.77,1090.23 3059.1,1090.23 ; v1(2967,1419) 3000.67,1452.67 3000.67,1486 ; 3059.1,100.82 3104.18,100.82 v1(3145,60) ; 3059.1,126.41 3166.59,126.41 v1(3185,108) ; 3059.1,1115.82 3104.18,1115.82 v1(3145,1075) ; 3059.1,1141.41 3166.59,1141.41 v1(3185,1123) ; 3146,3115 3219,3115 3251,3083 3251,3015 3216,2980 3216,2815 3243.41,2787.59 3309.72,2787.59 ; v2(3435,41) 3495,41 3529.23,75.23 3552,75.23 ; v2(3435,1056) 3495,1056 3529.23,1090.23 3552,1090.23 ; v1@3460.82,2813.18 3542,2813.18 ; 3462,805 3462,709 3412,659 3412,146 3457.18,100.82 3552,100.82 ; 3462,1820 3462,1724 3412,1674 3412,1161 3457.18,1115.82 3552,1115.82 ; 3500.62,153.56 3480,174.19 3480,603 3503,626 v1(3538,626) ; 3500.62,1168.56 3480,1189.19 3480,1618 3503,1641 v1(3538,1641) ; 3502,152 3552,152 ; 3502,1167 3552,1167 ; 3542,2787.59 3593.59,2787.59 3614,2808 v1(3614,2894) ; 3552,126.41 3480.59,126.41 3446,161 3446,628 3551,733 3590,733 3662,805 ; 3552,1141.41 3480.59,1141.41 3446,1176 3446,1643 3551,1748 3590,1748 3662,1820 ; v1(3641,200) 3641,94 3659.77,75.23 3733.1,75.23 ; v1(3641,404) 3674.67,437.67 3674.67,471 ; v1(3641,1215) 3641,1109 3659.77,1090.23 3733.1,1090.23 ; v1(3641,1419) 3674.67,1452.67 3674.67,1486 ; 3672,2952 3682,2952 ; 3733.1,100.82 3778.18,100.82 v1(3819,60) ; 3733.1,126.41 3840.59,126.41 v1(3859,108) ; 3733.1,1115.82 3778.18,1115.82 v1(3819,1075) ; 3733.1,1141.41 3840.59,1141.41 v1(3859,1123)
  Top Layer w18: 868.82,1364 868.82,1478.17 ; 868.82,3727 868.82,3841.17 ; 2458.83,2865.82 2573,2865.82
  Top Layer w20: v1(80,1209) 80,1251 114,1285 170,1285 ; v1(80,3572) 80,3614 114,3648 170,3648 ; 165,845 285.08,845 ; 165,3208 285.08,3208 ; 170,1104 170,1195 ; 170,3467 170,3558 ; 171,1105 265,1105 427,1105 478,1156 827,1156 1121,862 1342,862 v1(1377,897) ; 171,3468 265,3468 427,3468 478,3519 827,3519 1121,3225 1342,3225 v1(1377,3260) ; 259.45,753.45 260,754 261,755 385,755 ; 259.45,3116.45 260,3117 261,3118 385,3118 ; v1(260,584) 260,664 ; v1(260,2947) 260,3027 ; 463.74,717.6 507.6,717.6 565,775 ; 463.74,3080.6 507.6,3080.6 565,3138 ; v1(539,1044) 574,1079 760,1079 ; v1(539,3407) 574,3442 760,3442 ; 585,435 670,435 711,394 757,394 ; 585,2798 670,2798 711,2757 757,2757 ; v1(592,1219) 615,1196 842,1196 1053,985 v1(1093,985) ; v1(592,3582) 615,3559 842,3559 1053,3348 v1(1093,3348) ; 660,1004 594,1004 582,992 521,992 v1(469,1044) 542,1117 810,1117 1100,827 v1(1388,827) ; 660,3367 594,3367 582,3355 521,3355 v1(469,3407) 542,3480 810,3480 1100,3190 v1(1388,3190) ; 760,1004 760,1079 ; 760,3367 760,3442 ; 805,255 870,255 899,226 899,153 963,89 1156,89 ; 805,2618 870,2618 899,2589 899,2516 963,2452 1156,2452 ; 805.33,109 v1(875,109) ; 805.33,2472 v1(875,2472) ; v1@816.18,476.18 v1(817,477) ; v1@816.18,2839.18 v1(817,2840) ; v1(897,323) 955,265 ; v1(897,2686) 955,2628 ; 955,255 955,185 1005,135 ; 955,2618 955,2548 1005,2498 ; 971.18,1364 971.18,1255.82 1010,1217 v2(1064,1217) ; 971.18,3727 971.18,3618.82 1010,3580 v2(1064,3580) ; v1(1084,585) 1313,585 1385,657 ; v1(1084,2948) 1313,2948 1385,3020 ; v1(1377.17,769.83) 1356,791 1082,791 794,1079 760,1079 ; v1(1377.17,3132.83) 1356,3154 1082,3154 794,3442 760,3442 ; v2(2186,487) 2186,526 2213.73,553.73 2250.07,553.73 ; v2(2186,1502) 2186,1541 2213.73,1568.73 2250.07,1568.73 ; 2188,385.67 2228.67,345 2288,345 ; 2188,1400.67 2228.67,1360 2288,1360 ; 2203,255 2288,255 ; 2203,1270 2288,1270 ; 2269.49,471 2250.07,490.42 2250.07,553.73 ; 2269.49,1486 2250.07,1505.42 2250.07,1568.73 ; 2269.76,659 2250.07,639.32 2250.07,553.73 ; 2269.76,1674 2250.07,1654.32 2250.07,1568.73 ; 2320.67,471 2446,471 ; 2320.67,1486 2446,1486 ; 2320.94,553.73 2446.73,553.73 ; 2320.94,659 2380,659 ; 2320.94,1568.73 2446.73,1568.73 ; 2320.94,1674 2380,1674 ; 2380,554.73 v1(2380,598) ; 2380,1569.73 v1(2380,1613) ; 2447,659 2380,659 ; 2447,1674 2380,1674 ; v1(2467,731) 2396,731 2380,715 2380,659 ; v1(2467,1746) 2396,1746 2380,1730 2380,1674 ; 2573,2968.18 2681.18,2968.18 2720,3007 v2(2720,3061) ; 2652,2167 2652,2111 2686,2077 v1(2728,2077) ; v1(2718,2589) 2741,2612 2741,2839 2952,3050 v1(2952,3090) ; 2742,2167 2833,2167 ; 2832,2168 2832,2262 2832,2424 2781,2475 2781,2824 3075,3118 3075,3339 v1(3040,3374) ; v2(2866,487) 2866,526 2893.73,553.73 2930.07,553.73 ; v2(2866,1502) 2866,1541 2893.73,1568.73 2930.07,1568.73 ; 2868,385.67 2908.67,345 2968,345 ; 2868,1400.67 2908.67,1360 2968,1360 ; 2883,255 2968,255 ; 2883,1270 2968,1270 ; v1(2893,2536) 2858,2571 2858,2757 ; 2933,2657 2933,2591 2945,2579 2945,2518 v1(2893,2466) 2820,2539 2820,2807 3110,3097 v1(3110,3385) ; 2933,2757 2858,2757 ; 2949.49,471 2930.07,490.42 2930.07,553.73 ; 2949.49,1486 2930.07,1505.42 2930.07,1568.73 ; 2949.76,659 2930.07,639.32 2930.07,553.73 ; 2949.76,1674 2930.07,1654.32 2930.07,1568.73 ; 3000.67,471 3126,471 ; 3000.67,1486 3126,1486 ; 3000.94,553.73 3126.73,553.73 ; 3000.94,659 3060,659 ; 3000.94,1568.73 3126.73,1568.73 ; 3000.94,1674 3060,1674 ; 3060,554.73 v1(3060,598) ; 3060,1569.73 v1(3060,1613) ; 3092,2162 3092,2282.08 ; 3127,659 3060,659 ; 3127,1674 3060,1674 ; v1(3147,731) 3076,731 3060,715 3060,659 ; v1(3147,1746) 3076,1746 3060,1730 3060,1674 ; 3162,2562 3219.4,2504.6 3219.4,2460.74 ; v1(3167.17,3374.17) 3146,3353 3146,3079 2858,2791 2858,2757 ; 3182,2382 3182,2258 3183,2257 3183.55,2256.45 ; 3273,2257 v1(3353,2257) ; 3280,3382 3352,3310 v1(3352,3081) ; v1(3460,2814) v1@3460.82,2813.18 ; 3502,2582 3502,2667 3543,2708 3543,2754 ; v2(3540,487) 3540,526 3567.73,553.73 3604.07,553.73 ; v2(3540,1502) 3540,1541 3567.73,1568.73 3604.07,1568.73 ; 3542,385.67 3582.67,345 3642,345 ; 3542,1400.67 3582.67,1360 3642,1360 ; 3557,255 3642,255 ; 3557,1270 3642,1270 ; v1(3614,2894) 3672,2952 ; 3623.49,471 3604.07,490.42 3604.07,553.73 ; 3623.49,1486 3604.07,1505.42 3604.07,1568.73 ; 3623.76,659 3604.07,639.32 3604.07,553.73 ; 3623.76,1674 3604.07,1654.32 3604.07,1568.73 ; 3674.67,471 3800,471 ; 3674.67,1486 3800,1486 ; 3674.94,553.73 3800.73,553.73 ; 3674.94,659 3734,659 ; 3674.94,1568.73 3800.73,1568.73 ; 3674.94,1674 3734,1674 ; 3682,2802 3682,2867 3711,2896 3784,2896 3848,2960 3848,3153 ; 3682,2952 3752,2952 3802,3002 ; 3734,554.73 v1(3734,598) ; 3734,1569.73 v1(3734,1613) ; 3801,659 3734,659 ; 3801,1674 3734,1674 ; v1(3821,731) 3750,731 3734,715 3734,659 ; v1(3821,1746) 3750,1746 3734,1730 3734,1674 ; 3828,2802.33 v1(3828,2872)
  Top Layer w25: 260,754 260,801.18 294.45,835.63 ; 260,3117 260,3164.18 294.45,3198.63 ; 265,1015 277,1015 303,989 v2(381,989) ; 265,3378 277,3378 303,3352 v2(381,3352) ; 381,1053 v2(381,989) ; 381,3416 v2(381,3352) ; v1(419,215) 469,215 538,284 538,388 585,435 ; v1(419,2578) 469,2578 538,2647 538,2751 585,2798 ; 475.55,914.37 398.63,914.37 381,932 v2(381,989) ; 475.55,3277.37 398.63,3277.37 381,3295 v2(381,3352) ; 486,1442 486,1403 504,1385 663,1385 686,1408 686,1452 731,1452 770.17,1491.17 812.72,1491.17 ; 486,3805 486,3766 504,3748 663,3748 686,3771 686,3815 731,3815 770.17,3854.17 812.72,3854.17 ; 538,288 631,288 705,214 v4(705,75) 738,42 981,42 ; 538,2651 631,2651 705,2577 v4(705,2438) 738,2405 981,2405 ; v1(588,336) 656,336 737,255 805,255 ; v1(588,2699) 656,2699 737,2618 805,2618 ; 660,914 760,914 829,914 v2(857,942) ; 660,3277 760,3277 829,3277 v2(857,3305) ; 1205,1515 1145,1515 1120,1490 1120,1273 v2(1064,1217) 1207,1217 1225,1235 ; 1205,3878 1145,3878 1120,3853 1120,3636 v2(1064,3580) 1207,3580 1225,3598 ; 1445,1095 1573.03,1095 ; 1445,3458 1573.03,3458 ; 1705,195 1845,195 ; 1705,295 1845,295 ; 1705,395 1845,395 ; 1705,495 1845,495 ; 1705,2558 1845,2558 ; 1705,2658 1845,2658 ; 1705,2758 1845,2758 ; 1705,2858 1845,2858 ; 2186,387.67 v2(2186,487) ; 2186,1402.67 v2(2186,1502) ; 2188,240 2203,255 ; 2188,1255 2203,1270 ; 2288,255 2363,255 ; 2288,1270 2363,1270 ; 2365,160 2365,343 2424,402 2478,402 2537,461 ; 2365,1175 2365,1358 2424,1417 2478,1417 2537,1476 ; 2422,3202 2422,3142 2447,3117 2664,3117 v2(2720,3061) 2720,3204 2702,3222 ; 2445.83,2809.72 2445.83,2767.17 2485,2728 2485,2683 2529,2683 2552,2660 2552,2501 2534,2483 2495,2483 ; 2508,805 2508,751 2537,722 2537,659 2537,554 2537,471 ; 2508,1820 2508,1766 2537,1737 2537,1674 2537,1569 2537,1486 ; 2536,457 2536,471 ; 2536,1472 2536,1486 ; 2842,3442 2842,3570.03 ; 2866,387.67 v2(2866,487) ; 2866,1402.67 v2(2866,1502) ; 2868,240 2883,255 ; 2868,1255 2883,1270 ; 2884,2378 v2(2948,2378) ; 2922,2262 2922,2274 2948,2300 v2(2948,2378) ; 2968,255 3043,255 ; 2968,1270 3043,1270 ; v2(2995,2854) 3023,2826 3023,2757 3023,2657 ; 3022.63,2472.55 3022.63,2395.63 3005,2378 v2(2948,2378) ; 3045,160 3045,343 3104,402 3158,402 3217,461 ; 3045,1175 3045,1358 3104,1417 3158,1417 3217,1476 ; 3101.37,2291.45 3135.82,2257 3183,2257 ; 3188,805 3188,751 3217,722 3217,659 3217,554 3217,471 ; 3188,1820 3188,1766 3217,1737 3217,1674 3217,1569 3217,1486 ; 3216,457 3216,471 ; 3216,1472 3216,1486 ; 3442,3702 3442,3842 ; 3502,2582 3549,2535 3653,2535 3722,2466 v1(3722,2416) ; 3540,387.67 v2(3540,487) ; 3540,1402.67 v2(3540,1502) ; 3542,240 3557,255 ; 3542,1255 3557,1270 ; 3542,3702 3542,3842 ; v1(3601,2585) 3601,2653 3682,2734 3682,2802 ; 3642,255 3717,255 ; 3642,1270 3717,1270 ; 3642,3702 3642,3842 ; 3649,2535 3649,2628 3723,2702 v4(3862,2702) 3895,2735 3895,2978 ; 3719,160 3719,343 3778,402 3832,402 3891,461 ; 3719,1175 3719,1358 3778,1417 3832,1417 3891,1476 ; 3742,3702 3742,3842 ; 3862,805 3862,751 3891,722 3891,659 3891,554 3891,471 ; 3862,1820 3862,1766 3891,1737 3891,1674 3891,1569 3891,1486 ; 3890,457 3890,471 ; 3890,1472 3890,1486
  Top Layer w30: v2(265,1192) 265,1295 ; v2(265,3555) 265,3658 ; 655,775 1015,775 v2(1055,735) ; 655,3138 1015,3138 v2(1055,3098) ; 2642,2262 v2(2745,2262) ; 3162,2652 3162,3012 v2(3202,3052)
  Top Layer w40: 585,454 v2(655,524) ; 585,2817 v2(655,2887) ; 805,109.33 805.33,109 ; 805,2472.33 805.33,2472 ; 1225,1388.54 1333.2,1388.54 ; 1225,3751.54 1333.2,3751.54 ; v2(1540,1423) 1659,1423 ; v2(1540,3786) 1659,3786 ; 1640,1404 1659,1423 ; 1640,3767 1659,3786 ; 1660,1424 1659,1423 ; 1660,3787 1659,3786 ; 1680,1367 1722,1367 1825,1264 1825,1185.55 ; 1680,3730 1722,3730 1825,3627 1825,3548.55 ; v3@1740,1042 1687,1095 1825,1095 ; v3@1740,3405 1687,3458 1825,3458 ; 1845,95 1632,95 1597,130 1597,544 1648,595 1803,595 1865,657 ; 1845,2458 1632,2458 1597,2493 1597,2907 1648,2958 1803,2958 1865,3020 ; 2513,3657 2514,3656 ; v2(2514,3537) 2514,3656 ; 2533,3637 2514,3656 ; 2548.46,3222 2548.46,3330.2 ; 2570,3677 2570,3719 2673,3822 2751.45,3822 ; 2842,3822 2842,3684 v3@2895,3737 ; 3280,3862 3342,3800 3342,3645 3393,3594 3807,3594 3842,3629 3842,3842 ; v2(3413,2652) 3483,2582 ; 3827.67,2802 3828,2802.33
  Top Layer w50: 884.57,1493.92 955.43,1493.92 ; 884.57,3856.92 955.43,3856.92 ; 2443.08,2881.57 2443.08,2952.43
  Bottom Layer w10: 356,685.98 356.22,686.2 ; 356,3048.98 356.22,3049.2 ; 812.72,1383.69 824.53,1371.87 ; 812.72,3746.69 824.53,3734.87 ; 2553.31,2809.72 2565.13,2821.53 ; 3250.8,2353.22 3251.02,2353
  Bottom Layer w15: 960,1076 960,1113 ; 960,3439 960,3476 ; v1(2380,598) 2329,547 2329,257.28 2465,121.28 v1(2465,60) ; v1(2380,1613) 2329,1562 2329,1272.28 2465,1136.28 v1(2465,1075) ; v1(2467,731) 2467,577 2361,471 2361,264 2452,173 2489,173 2505,157 v1(2505,108) ; v1(2467,1746) 2467,1592 2361,1486 2361,1279 2452,1188 2489,1188 2505,1172 v1(2505,1123) ; 2824,2957 2861,2957 ; v1(3060,598) 3009,547 3009,257.28 3145,121.28 v1(3145,60) ; v1(3060,1613) 3009,1562 3009,1272.28 3145,1136.28 v1(3145,1075) ; v1(3147,731) 3147,577 3041,471 3041,264 3132,173 3169,173 3185,157 v1(3185,108) ; v1(3147,1746) 3147,1592 3041,1486 3041,1279 3132,1188 3169,1188 3185,1172 v1(3185,1123) ; v1(3734,598) 3683,547 3683,257.28 3819,121.28 v1(3819,60) ; v1(3734,1613) 3683,1562 3683,1272.28 3819,1136.28 v1(3819,1075) ; v1(3821,731) 3821,577 3715,471 3715,264 3806,173 3843,173 3859,157 v1(3859,108) ; v1(3821,1746) 3821,1592 3715,1486 3715,1279 3806,1188 3843,1188 3859,1172 v1(3859,1123)
  Bottom Layer w20: v1(80,1209) 120,1249 120,1331.87 120,1405 135,1420 341,1420 356.22,1404.78 356.22,1331.87 ; v1(80,3572) 120,3612 120,3694.87 120,3768 135,3783 341,3783 356.22,3767.78 356.22,3694.87 ; 85,95 205,215 205,295 ; 85,295 198.74,408.74 198.74,686.2 ; 85,395 85,570 120,605 120,686.2 ; 85,2458 205,2578 205,2658 ; 85,2658 198.74,2771.74 198.74,3049.2 ; 85,2758 85,2933 120,2968 120,3049.2 ; 206,305 206,349 298,441 414,441 434.96,461.96 434.96,686.2 ; 206,2668 206,2712 298,2804 414,2804 434.96,2824.96 434.96,3049.2 ; v1(260,584) 279,603 279,684.68 277.48,686.2 ; v1(260,2947) 279,2966 279,3047.69 277.48,3049.2 ; 295,295 365,295 365,235 385,215 v1(419,215) ; 295,2658 365,2658 365,2598 385,2578 v1(419,2578) ; 356,395 505,395 629,395 660,364 660,257 v4(605,202) ; 356,485 356,685.98 ; 356,2758 505,2758 629,2758 660,2727 660,2620 v4(605,2565) ; 356,2848 356,3048.98 ; 434.96,1331.87 434.96,1156.04 469,1122 v1@469,1045 ; 434.96,3694.87 434.96,3519.04 469,3485 v1@469,3408 ; 455,295 547,295 v1(588,336) ; 455,2658 547,2658 v1(588,2699) ; 513.7,1331.87 513.7,1182.3 539,1157 v1(539,1044) ; 513.7,3694.87 513.7,3545.3 539,3520 v1(539,3407) ; v1(592,1219) 592,1331.43 592.44,1331.87 ; v1(592,3582) 592,3694.43 592.44,3694.87 ; 592.44,686.2 593,685.65 ; 592.44,3049.2 593,3048.65 ; v1(817,477) 945,477 ; v1(817,2840) 945,2840 ; v1(875,109) 909,75 1005,75 ; v1(875,2472) 909,2438 1005,2438 ; v1(897,323) 897,283 915,265 1025,265 1086,204 1167,204 1185,222 1185,295 ; v1(897,2686) 897,2646 915,2628 1025,2628 1086,2567 1167,2567 1185,2585 1185,2658 ; 963,477 986,500 1135,500 ; 963,2840 986,2863 1135,2863 ; 1005,165 1205,165 1235,195 ; 1005,2528 1205,2528 1235,2558 ; v1(1084,585) 1135,534 1135,500 ; v1(1084,2948) 1135,2897 1135,2863 ; v1(1093,985) 1093,836 1235,694 1235,500 ; v1(1093,3348) 1093,3199 1235,3057 1235,2863 ; 1139,496 1135,500 ; 1139,2859 1135,2863 ; 1185,500 1185,423 1205,403 1285,403 ; 1185,2863 1185,2786 1205,2766 1285,2766 ; 1235,295 1235,195 ; 1235,2658 1235,2558 ; 1280,635 1280,688 v2(1307,715) ; 1280,2998 1280,3051 v2(1307,3078) ; 1285,295 1285,403 ; 1285,500 1285,630 ; 1285,2658 1285,2766 ; 1285,2863 1285,2993 ; v1(1377,897) 1449,897 1469,877 1631,877 1712,796 1712,692 1845,559 1845,495 ; v1(1377,3260) 1449,3260 1469,3240 1631,3240 1712,3159 1712,3055 1845,2922 1845,2858 ; v1(1377.17,769.83) 1595.17,769.83 1631,734 1631,369 1705,295 ; v1(1377.17,3132.83) 1595.17,3132.83 1631,3097 1631,2732 1705,2658 ; v1(1388,827) 1616,827 1670,773 1670,669 1774,565 1774,466 1845,395 ; v1(1388,3190) 1616,3190 1670,3136 1670,3032 1774,2928 1774,2829 1845,2758 ; 1413,369 1379,403 1285,403 ; 1413,2732 1379,2766 1285,2766 ; 1416,277 1334,195 1235,195 ; 1416,2640 1334,2558 1235,2558 ; 1425,275 1525,275 ; 1425,365 1525,365 1525,657 ; 1425,2638 1525,2638 ; 1425,2728 1525,2728 1525,3020 ; v1(2184,626) 2208,650 2208,805 ; v1(2184,1641) 2208,1665 2208,1820 ; v1(2287,200) v1(2287,404) ; v1(2287,1215) v1(2287,1419) ; 2605.13,2353.22 2532.22,2353.22 2517,2338 2517,2132 2532,2117 2605.13,2117 2688,2117 v1(2728,2077) ; 2605.13,2431.96 2780.96,2431.96 2815,2466 v1@2892,2466 ; 2605.13,2510.7 2754.7,2510.7 2780,2536 v1(2893,2536) ; 2605.13,2589.44 2605.57,2589 v1(2718,2589) ; v1(2864,626) 2888,650 2888,805 ; v1(2864,1641) 2888,1665 2888,1820 ; v1(2952,3090) 3101,3090 3243,3232 3437,3232 ; v1(2967,200) v1(2967,404) ; v1(2967,1215) v1(2967,1419) ; v1(3040,3374) 3040,3446 3060,3466 3060,3628 3141,3709 3245,3709 3378,3842 3442,3842 ; v1(3110,3385) 3110,3613 3164,3667 3268,3667 3372,3771 3471,3771 3542,3842 ; v1(3167.17,3374.17) 3167.17,3592.17 3203,3628 3568,3628 3642,3702 ; v2(3222,3304) 3249,3277 3302,3277 ; 3250.8,2117 3332,2117 3367,2082 3542,2082 ; 3250.8,2195.74 3528.26,2195.74 3642,2082 ; 3250.8,2274.48 3252.31,2276 3334,2276 v1(3353,2257) ; 3250.8,2431.96 3475.04,2431.96 3496,2411 3496,2295 3588,2203 3632,2203 ; 3250.8,2589.44 3251.35,2590 ; 3251.02,2353 3452,2353 ; 3280,3522 3572,3522 3572,3422 ; 3307,3282 3437,3282 ; v1(3352,3081) 3403,3132 3437,3132 ; 3437,3182 3514,3182 3534,3202 3534,3282 ; 3441,3136 3437,3132 ; v1(3460,2814) 3460,2942 ; 3460,2960 3437,2983 3437,3132 ; v1(3538,626) 3562,650 3562,805 ; v1(3538,1641) 3562,1665 3562,1820 ; 3542,2353 3542,2502 3542,2626 3573,2657 3680,2657 v4(3735,2602) ; 3568,3410 3534,3376 3534,3282 ; v1(3601,2585) 3642,2544 3642,2452 ; v1(3614,2894) 3654,2894 3672,2912 3672,3022 3733,3083 3733,3164 3715,3182 3642,3182 ; v1(3641,200) v1(3641,404) ; v1(3641,1215) v1(3641,1419) ; 3642,2202 3722,2202 3842,2082 ; 3642,2292 3642,2362 3702,2362 3722,2382 v1(3722,2416) ; 3642,3232 3742,3232 ; 3642,3282 3534,3282 ; 3660,3413 3742,3331 3742,3232 ; 3662,3422 3662,3522 ; 3772,3002 3772,3202 3742,3232 ; v1(3828,2872) 3862,2906 3862,3002
  Bottom Layer w25: 812.72,1383.69 812.72,1491.17 ; 812.72,3746.69 812.72,3854.17 ; 960,1113 v2(1064,1217) ; 960,3476 v2(1064,3580) ; 1025,355 1038,355 ; 1025,2718 1038,2718 ; 1027.28,1383.69 1027.28,1491.17 ; 1027.28,3746.69 1027.28,3854.17 ; 1639.68,1378.68 1639.68,1404 ; 1639.68,3741.69 1639.68,3767 ; 2445.83,2809.72 2553.31,2809.72 ; 2445.83,3024.28 2553.31,3024.28 ; 2533,3636.69 2558.31,3636.69 ; v2(2720,3061) 2824,2957 ; 3582,3022 3582,3035
  Bottom Layer w30: 277.48,1331.87 277.48,1252.48 265,1240 v2(265,1192) 381,1076 v2(381,989) ; 277.48,3694.87 277.48,3615.48 265,3603 v2(265,3555) 381,3439 v2(381,3352) ; 960,766 960,812 ; 960,3129 960,3175 ; 1003,735 v2(1055,735) ; 1003,3098 v2(1055,3098) ; 1364.09,1404 1364.09,1294.91 1395,1264 1395,1215 ; 1364.09,3767 1364.09,3657.91 1395,3627 1395,3578 ; 2533,3361.09 2642.09,3361.09 2673,3392 2722,3392 ; 2605.13,2274.48 2684.52,2274.48 2697,2262 v2(2745,2262) 2861,2378 v2(2948,2378) ; 3125,2957 3171,2957 ; 3202,3000 v2(3202,3052)
  Bottom Layer w35: 812.72,1491.17 1027.28,1491.17 ; 812.72,3854.17 1027.28,3854.17 ; 824.53,1371.87 1015.47,1371.87 ; 824.53,3734.87 1015.47,3734.87 ; 2445.83,2809.72 2445.83,3024.28 ; 2565.13,2821.53 2565.13,3012.47
  Bottom Layer w40: v2(381,989) 606,989 653,1036 653,1228 671.18,1246.18 671.18,1331.87 737.13,1331.87 791,1278 1168,1278 1305,1141 1305,1035 1305,931 1273,899 1273,749 v2(1307,715) ; v2(381,3352) 606,3352 653,3399 653,3591 671.18,3609.18 671.18,3694.87 737.13,3694.87 791,3641 1168,3641 1305,3504 1305,3398 1305,3294 1273,3262 1273,3112 v2(1307,3078) ; 592.44,686.2 671.18,686.2 ; 592.44,3049.2 671.18,3049.2 ; v2@655,523 731,523 776,568 776,645 857,726 v2(857,942) 857,1274 ; v2@655,2886 731,2886 776,2931 776,3008 857,3089 v2(857,3305) 857,3637 ; 1364.09,1404 1383.09,1423 v2(1540,1423) ; 1364.09,3767 1383.09,3786 v2(1540,3786) ; 1768,1014 1768,754 1865,657 ; 1768,3377 1768,3117 1865,3020 ; v2(2514,3537) 2514,3380.09 2533,3361.09 ; 2663,2854 v2(2995,2854) 3211,2854 3292,2773 3369,2773 3414,2728 v2@3414,2652 ; 2923,3765 3183,3765 3280,3862 ; v2(2948,2378) 2948,2603 2901,2650 2709,2650 2690.82,2668.18 2605.13,2668.18 2605.13,2734.13 2659,2788 2659,3165 2796,3302 2902,3302 3006,3302 3038,3270 3188,3270 v2(3222,3304) ; 3250.8,2589.44 3250.8,2668.18
  Bottom Layer w50: 1305,1035 v3@1649,1035 ; 1305,3398 v3@1649,3398 ; 2902,3302 v3@2902,3646
  other v1: 2287,39 2967,39 3641,39 2287,1054 2967,1054 3641,1054
  other v2: 1441,89 1049,432 1441,488 515,569 912,649 43,685 381,845 1514,939 43,1005 1556,1295 43,1325 539,1533 1508,1533 2612,2040 2932,2040 3252,2040 3092,2378 1441,2452 3368,2512 2404,2536 1049,2795 1441,2851 3288,2909 515,2932 912,3012 3505,3046 43,3048 381,3208 1514,3302 43,3368 3449,3438 3848,3438 2404,3505 2998,3511 2642,3553 1556,3658 43,3688 539,3896 1508,3896
  other v3: 1702.95,976.89 1667.52,1032.01 1730.51,1032.01 1667.52,1095 1730.51,1095 1667.52,1157.99 1730.51,1157.99 1702.95,1213.11 1702.95,3339.89 1667.52,3395.01 1730.51,3395.01 1667.52,3458 1730.51,3458 1667.52,3520.99 1730.51,3520.99 1702.95,3576.11 2779.01,3664.52 2842,3664.52 2904.99,3664.52 2723.89,3699.95 2960.11,3699.95 2779.01,3727.51 2842,3727.51 2904.99,3727.51
  other v4: 505,75 505,2438 3862,2502

## Polygon pours and split planes (outlines as drawn)
no net on Top Layer "Bottom Layer-No Net" (solid, pour order 1000): 2362,1997 2362,3937 3937,3937 3937,1997 2362,1997
no net on Top Layer "Bottom Layer-No Net" (solid, pour order 1000): 0,1575 1940,1575 1940,0 0,0 0,1575
no net on Top Layer "Bottom Layer-No Net" (solid, pour order 1000): 0,3938 1940,3938 1940,2363 0,2363 0,3938
no net on Bottom Layer "Bottom Layer-No Net" (solid, pour order 1000): 3387,1015 3387,1890 3937,1890 3937,1015 3387,1015
no net on Bottom Layer "Bottom Layer-No Net" (solid, pour order 1000): 2713,1015 2713,1890 3263,1890 3263,1015 2713,1015
no net on Bottom Layer "Bottom Layer-No Net" (solid, pour order 1000): 2033,1015 2033,1890 2583,1890 2583,1015 2033,1015
no net on Bottom Layer "Bottom Layer-No Net" (solid, pour order 1000): 2033,0 2033,875 2583,875 2583,0 2033,0
no net on Bottom Layer "Bottom Layer-No Net" (solid, pour order 1000): 2713,0 2713,875 3263,875 3263,0 2713,0
no net on Bottom Layer "Bottom Layer-No Net" (solid, pour order 1000): 3387,0 3387,875 3937,875 3937,0 3387,0
no net on Bottom Layer "Bottom Layer-No Net" (solid, pour order 1000): 2362,1997 2362,3937 3937,3937 3937,1997 2362,1997
no net on Bottom Layer "Bottom Layer-No Net" (solid, pour order 1000): 0,1575 1940,1575 1940,0 0,0 0,1575
no net on Bottom Layer "Bottom Layer-No Net" (solid, pour order 1000): 0,3938 1940,3938 1940,2363 0,2363 0,3938

## Other copper
Top Layer:
  region: 3684,1025 3684,1181 3602,1181 3602,1025
  region: 3010,1025 3010,1181 2928,1181 2928,1025
  region: 2330,1025 2330,1181 2248,1181 2248,1025
  region: 2330,10 2330,166 2248,166 2248,10
  region: 3010,10 3010,166 2928,166 2928,10
  region: 3684,10 3684,166 3602,166 3602,10
  region: 2397,2735 2397,3092 2363,3092 2363,2735
  region: 3330,2817 3330,2836 3292,2836 3292,2817
  region: 2516,2773 2516,3050 2495,3050 2495,2773
  rectangle: 738,1540 1095,1574
  rectangle: 820,607 839,645
  rectangle: 776,1421 1053,1442
  rectangle: 738,3903 1095,3937
  rectangle: 820,2970 839,3008
  rectangle: 776,3784 1053,3805
Bottom Layer:
  region: 3746,1025 3746,1181 3544,1181 3544,1025
  region: 3072,1025 3072,1181 2870,1181 2870,1025
  region: 2392,1025 2392,1181 2190,1181 2190,1025
  region: 2392,10 2392,166 2190,166 2190,10
  region: 3072,10 3072,166 2870,166 2870,10
  region: 3746,10 3746,166 3544,166 3544,10
  region: 2571,2809.72 2571,3020 2445.83,3020 2445.83,2809.72
  rectangle: 812.72,1366 1023,1491.17
  rectangle: 812.72,3729 1023,3854.17

## Silkscreen, mask and mechanical layers (free items; w line width, h text height)
Top Overlay:
  text "INT" at 3464,3524 h40 r90
  text "SDA" at 3564,3524 h40 r90
  text "SCL" at 3664,3524 h40 r90
  text "GND" at 3764,3524 h40 r90
  text "3V3" at 3864,3524 h40 r90
  text "INT" at 305,3336 h40 r90
  text "SCL" at 520,3336 h40 r90
  text "GND" at 577,3329 h40 r90
  text "SDA" at 400.07,3327 h40 r90
  text "INT" at 1534,2841 h40
  text "SDA" at 1534,2741 h40
  text "TxD" at 150,2734 h40
  text "SCL" at 1534,2641 h40
  text "RxD" at 150,2634 h40
  text "GND" at 1534,2541 h40
  text "GND" at 185,2500 h40 r90
  text "3V3" at 1534,2441 h40
  text "GPIO0" at 91,2363 h40
  text "TxD" at 3561,2160 h40 r90
  text "RxD" at 3661,2160 h40 r90
  text "GND" at 3695,2145 h40
  text "GPIO0" at 3932,2101 h40 r90
  text "INT" at 2156,1656 h40 r90
  text "SCL" at 2371,1656 h40 r90
  text "INT" at 2836,1656 h40 r90
  text "SCL" at 3051,1656 h40 r90
  text "INT" at 3510,1656 h40 r90
  text "SCL" at 3725,1656 h40 r90
  text "GND" at 2428,1649 h40 r90
  text "GND" at 3108,1649 h40 r90
  text "GND" at 3782,1649 h40 r90
  text "SDA" at 2251.07,1647 h40 r90
  text "SDA" at 2931.07,1647 h40 r90
  text "SDA" at 3605.07,1647 h40 r90
  text "INT" at 2835,641 h40 r90
  text "SCL" at 3050,641 h40 r90
  text "INT" at 2155,636 h40 r90
  text "SCL" at 2370,636 h40 r90
  text "INT" at 3510,636 h40 r90
  text "SCL" at 3725,636 h40 r90
  text "GND" at 3107,634 h40 r90
  text "SDA" at 2930.07,632 h40 r90
  text "GND" at 2427,629 h40 r90
  text "GND" at 3782,629 h40 r90
  text "SDA" at 2250.07,627 h40 r90
  text "SDA" at 3605.07,627 h40 r90
  text "INT" at 1514,471 h40
  text "TxD" at 150,374 h40
  text "SDA" at 1514,371 h40
  text "RxD" at 150,274 h40
  text "SCL" at 1514,271 h40
  text "GND" at 1514,171 h40
  text "GND" at 185,135 h40 r90
  text "3V3" at 1514,71 h40
  text "GPIO0" at 91,3 h40
Mechanical 1:
  lines w10: 0,0 0,1574 1940,1574 1940,0 0,0 ; 0,0 3937.01,0 ; 0,0 0,3937.01 ; 0,3937 0,2363 1940,2363 1940,3937 0,3937 ; 0,3937.01 3937.01,3937.01 ; 3937,0 3937,875 3387,875 3387,0 3937,0 ; 3937.01,0 3937.01,3937.01 ; 3937,3937 3937,1997 2363,1997 2363,3937 3937,3937 ; 2033,0 2583,0 2583,875 2033,875 2033,0 ; 2033,1015 2033,1890 2583,1890 2583,1015 2033,1015 ; 2713,0 3263,0 3263,875 2713,875 2713,0 ; 2713,1015 2713,1890 3263,1890 3263,1015 2713,1015 ; 3387,1015 3387,1890 3937,1890 3937,1015 3387,1015

## Text inside footprints (layer, text, board x,y; h text height)
C3: Bottom Overlay "+" at 1295,995 h60 r180
C3: Bottom Overlay "+" at 2942,3292 h60 r270
C3: Bottom Overlay "+" at 1295,3358 h60 r180
Wi-Fi1: Bottom Overlay "Wi-Fi" at 170,914 h100 r180
Wi-Fi1: Bottom Overlay "Wi-Fi" at 170,3277 h100 r180
Wi-Fi1_3: Bottom Overlay "Wi-Fi" at 3023,2167 h100 r270